# Altium PCB 05-温湿度传感器模块-电路板图.PcbDoc
Units mm, origin at the board's own origin, x right, y up, seen from the top; angles counter-clockwise.
Board outline 35 x 35 mm, 2 copper layers (Top Layer, Bottom Layer); 5 components, 4 nets, 25 pads, 1 vias.
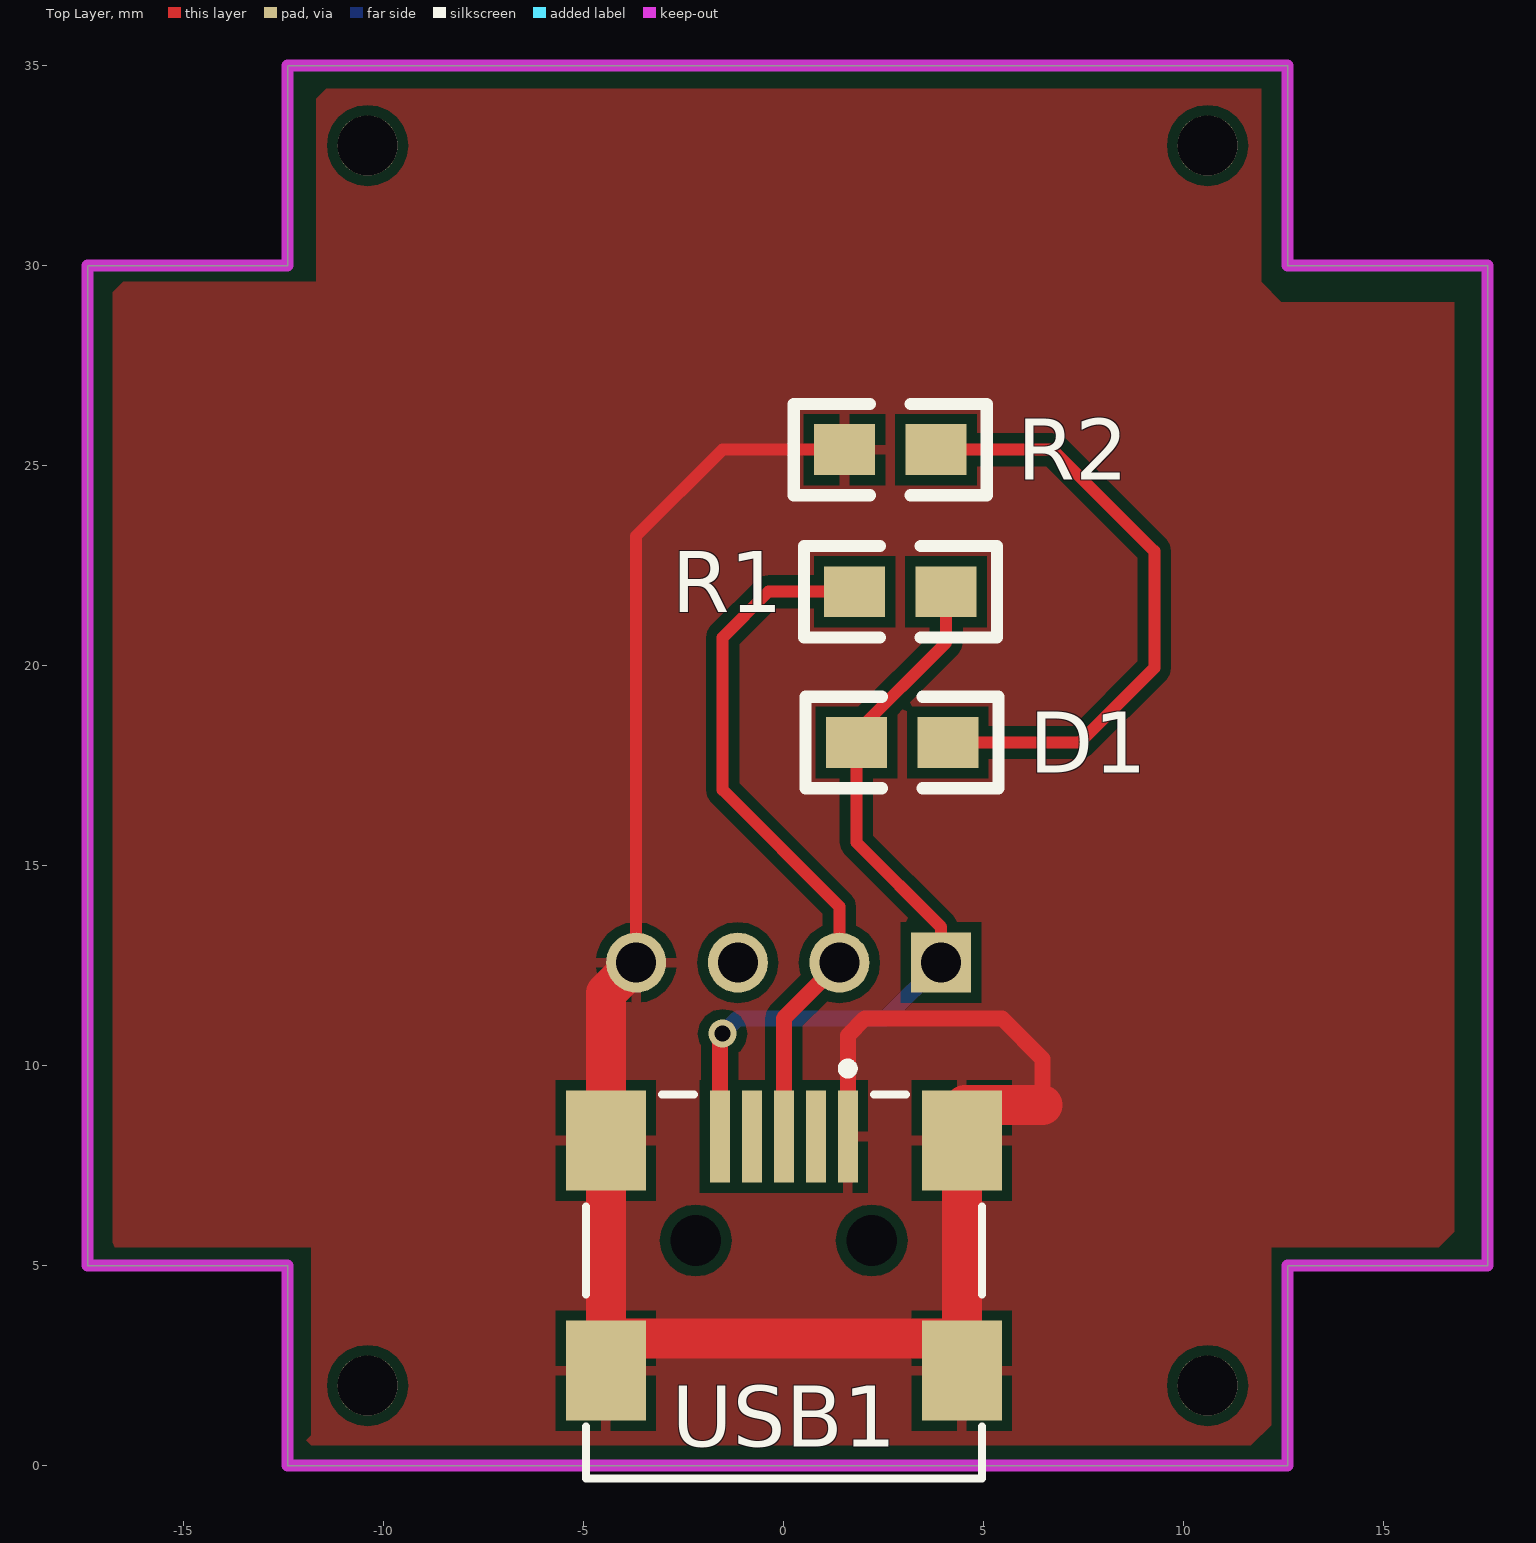
[diagram p0: Top Layer view]
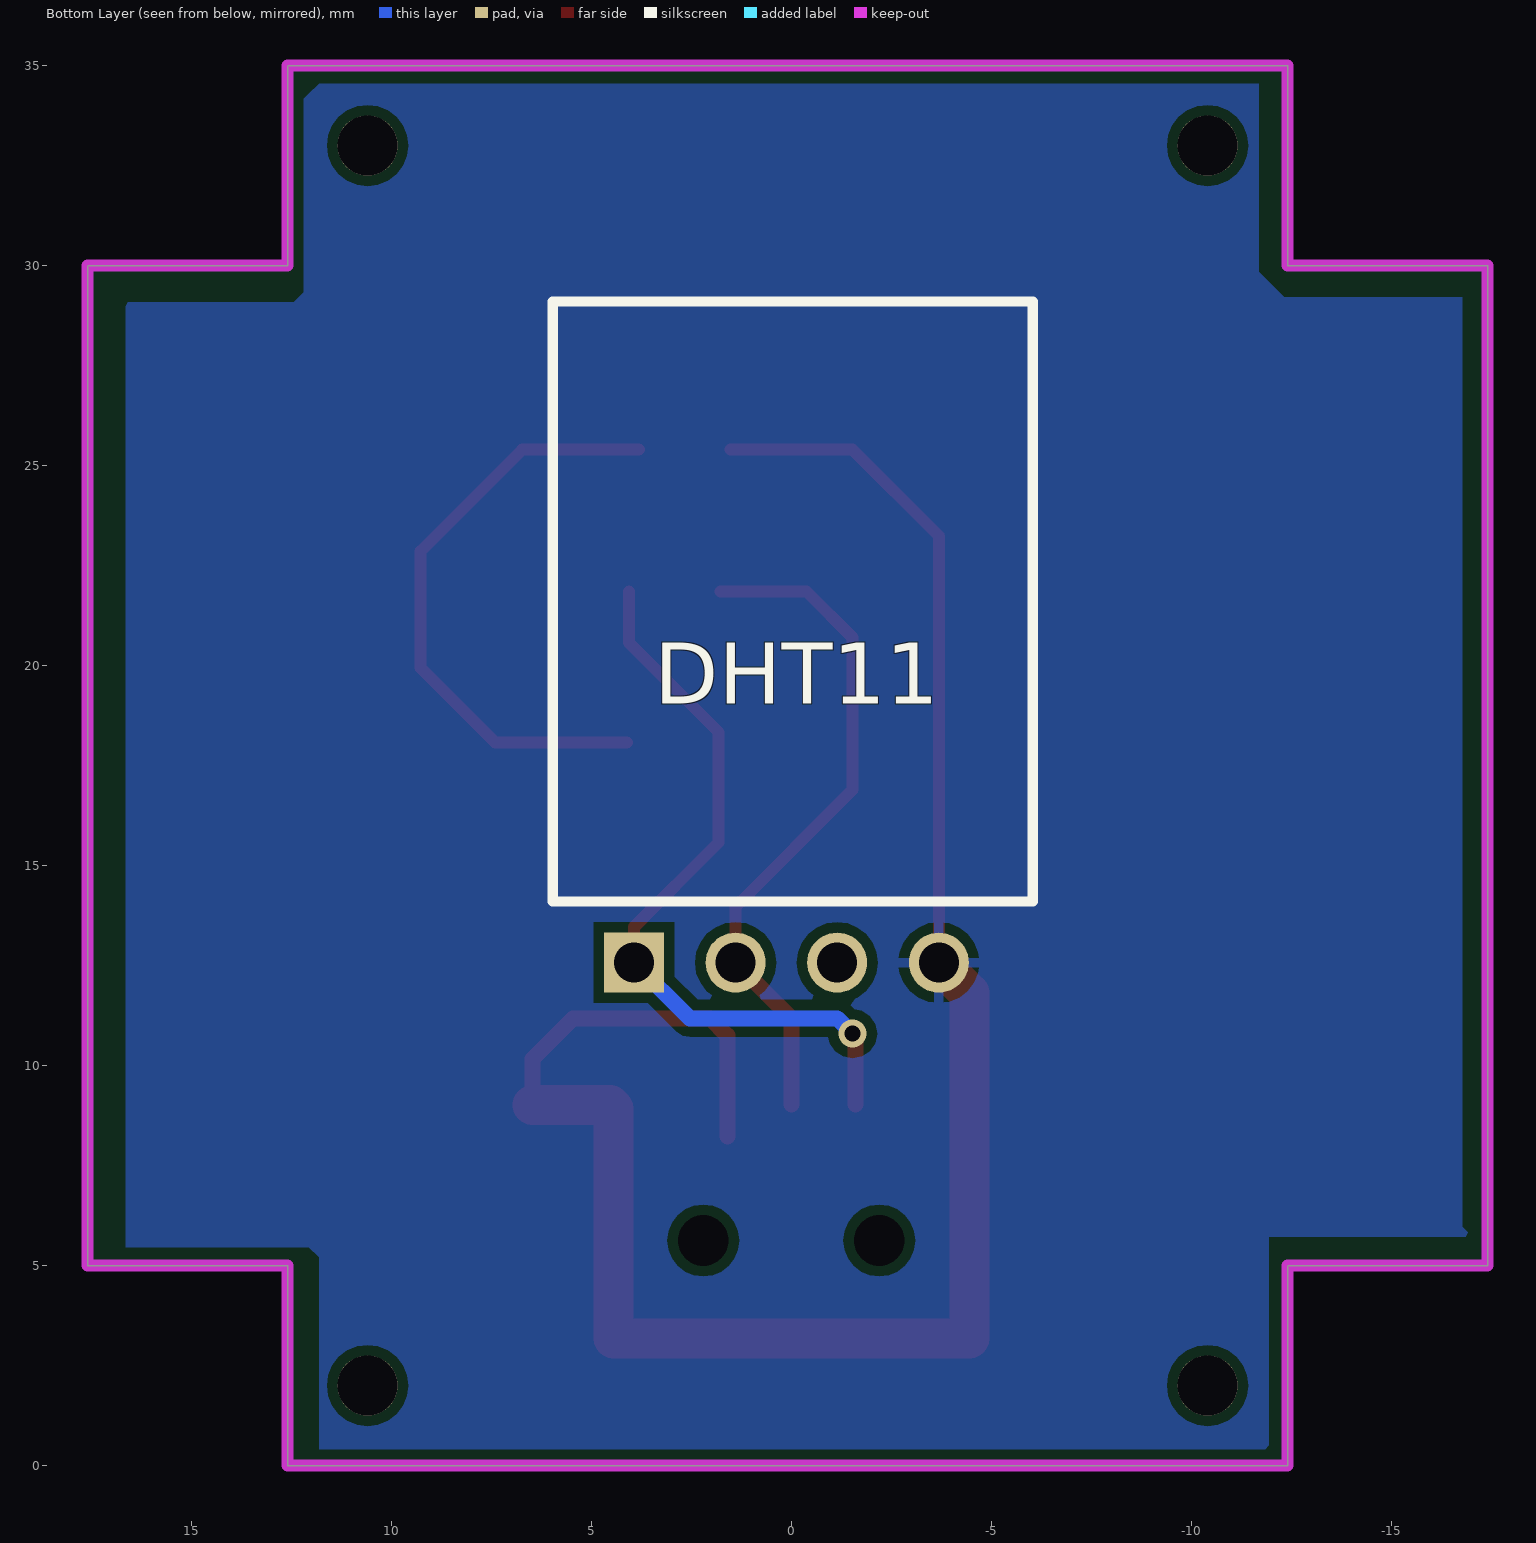
[diagram p1: Bottom Layer view, seen from below]

## Layer stack, top to bottom
Top Layer: signal copper 0.0356
Dielectric: dielectric 0.32, FR-4, Dk 4.8
Bottom Layer: signal copper 0.0356

## Board outline
-17.401,5 -12.401,5 -12.401,0 12.599,0 12.599,5 17.599,5 17.599,30 12.599,30 12.599,35 -12.401,35 -12.401,30 -17.401,30

## Design rules (kind name [scope] priority, off if disabled: settings)
Clearance [All] p1: gap=0.254
PolygonConnect [All] p1: connectstyle=Relief reliefconductorwidth=0.254 reliefentries=4 polygonreliefangle="90 Angle"
RoutingVias [All] p1: holewidth=0.711 width=1.27 viastyle="Through Hole" minholewidth=0.4 minwidth=0.7 maxholewidth=0.711 maxwidth=1.27
SilkscreenOverComponentPads [All] p1: minsilkscreentomaskgap=0.254
SolderMaskExpansion [All] p1: expansion=0.102
TestPointUsage FabricationTestPointUsage [All] p1: valid=0 allowmultiple=FALSE
Testpoint FabricationTestpoint [All] p1: side=3 testpointundercomponent=TRUE minsize=1.016 maxsize=2.54 preferedsize=1.524 minholesize=0 maxholesize=1.016 preferedholesize=0.813 testpointgrid=0.025 style=297 order=0123456789
Width [All] p1: maxlimit=0.3 minlimit=0.3 preferedwidth=0.3
23 further rules are at their usual default settings.

## Components (designator, comment, footprint, x,y, rotation, side; value= is the part's Value field where it differs from the comment)
D1 "LED0" 0805 1.821,18.077 r0 top
DHT11 "Header 4" DHT11 4.318,12.573 r180 bottom
R1 "Res2" 0805 4.064,21.844 r180 top
R2 "Res2" 0805 1.524,25.4 r0 top
USB1 "USB" USB/SM0.8-6H5 0.254,6.18 r90 top (schematic designator USB_1)

## Footprints (in the part's own frame and the unit in brackets; to place one, negate y for a bottom-side part, rotate by r counter-clockwise, add the part's x,y. Pads: shape width x height; smd on the part's side, far side on the other; paste and mask are expansions set on the pad)
0805 [mil]
  rect 60x50 smd: 1(0,-0.06) 2(90,-0.06)
  silkscreen extent -50,-45 140,45
DHT11 [mm]
  rect 1.5x1.5 hole 1: 1(0.381,0)
  round 1.5 hole 1: 2(2.921,0) 3(5.461,0) 4(8.001,0)
  silkscreen extent -1.65,1.52 10.35,16.52
USB/SM0.8-6H5 [mm]
  rect 2.3x0.5 smd: 1(2.044,-1.351) 2(2.044,-0.551) 3(2.044,0.249) 4(2.044,1.049) 5(2.044,1.849)
  rect 2.5x2 smd: 5(-3.81,-4.201) 5(-3.81,4.699) 5(1.944,4.699) 5(1.944,-4.201)
  round 0.6 hole 1.27 unplated: MH1(-0.556,2.449) MH2(-0.556,-1.951)
  silkscreen extent -6.51,-4.7 3.87,5.2

## Part data
D1: "Typical INFRARED GaAs LED"
DHT11: "Header, 4-Pin"
R1 R2: "Resistor"
USB1: library part USB5

## Free pads (board coordinates)
  round 1.5 hole 1.5: 0(-10.401,2) 0(-10.401,33) 0(10.599,2) 0(10.599,33)

## Via types
v1: diameter 0.7, hole 0.4, Top Layer to Bottom Layer, 1 vias

## Nets (pads, with @x,y where several pads share a name; then routed paths per layer and width w, separated by ;. In a path a pad name is that pad's centre, name@x,y a point inside that pad or via, vN(x,y) a via of type N, cw(c..) or ccw(c..) an arc to the next point about the centre after c; other vN are vias at no path point)
GND: DHT11.4 R2.1 USB1.1 USB1.5@4.455,2.37 USB1.5@4.455,8.124 USB1.5@-4.445,2.37 USB1.5@-4.445,8.124 | length 52.5
  Top Layer w0.3: DHT11.4 -3.683,23.241 -1.526,25.398 R2.1
  Top Layer w0.4: USB1.1 1.605,10.749 2.032,11.176 5.461,11.176 6.477,10.16 6.477,9.015 ; USB1.5@4.355,9.029 USB1.5@4.455,8.929
  Top Layer w1: DHT11.4 -4.445,11.811 -4.445,8.929 -4.445,3.175 4.455,3.175 4.455,8.929 4.541,9.015 6.477,9.015
NetD1_2: D1.2 R2.2 | length 15.4
  Top Layer w0.3: R2.2 6.733,25.398 9.271,22.86 9.271,19.939 7.407,18.075 D1.2
NetDHT11_2: DHT11.2 R1.2 USB1.3 | length 17.2
  Top Layer w0.3: DHT11.2 1.397,13.97 -1.524,16.891 -1.524,20.701 -0.379,21.846 R1.2
  Top Layer w0.4: USB1.3@0.005,9.029 0.005,11.181 DHT11.2
VCC: D1.1 DHT11.1 R1.1 USB1.5@-1.595,8.224 | length 19.1
  Top Layer w0.3: DHT11.1 3.937,13.462 1.821,15.578 D1.1 1.821,18.331 4.064,20.574 R1.1
  Top Layer w0.4: USB1.5@-1.595,9.029 -1.595,10.724 v1(-1.524,10.795)
  Top Layer w1: DHT11.1 DHT11.1@3.939,12.571
  Bottom Layer w0.4: v1(-1.524,10.795) -1.143,11.176 2.54,11.176 DHT11.1
pads on no net: DHT11.3 USB1.2 USB1.4 USB1.MH1 USB1.MH2

## Polygon pours and split planes (outlines as drawn)
GND on Top Layer "Top Layer-No Net" (solid): -16.764,29.337 -16.51,29.591 -11.684,29.591 -11.684,34.163 -11.557,34.29 -11.43,34.417 11.938,34.417 11.938,29.591 12.446,29.083 16.764,29.083 16.764,5.842 16.383,5.461 12.192,5.461 12.192,1.016 11.684,0.508 -7.112,0.508 -11.811,0.508 -11.938,0.635 -11.811,0.762 -11.811,5.461 -16.891,5.461 -16.764,5.588 -16.764,29.337
GND on Bottom Layer "Top Layer-No Net" (solid): -16.764,29.21 -12.319,29.21 -11.684,29.845 -11.684,34.544 11.811,34.544 12.065,34.29 12.192,34.163 12.192,29.591 12.192,29.337 12.446,29.083 12.954,29.083 16.764,29.083 16.637,28.956 16.637,5.461 12.065,5.461 11.811,5.207 11.811,0.381 -11.811,0.381 -11.938,0.508 -11.938,5.715 -17.018,5.715 -16.764,5.969 -16.764,29.21

## Keep-outs
Keep-Out Layer:
  lines w0.3: -11.839,0 12.037,0 ; -17.401,5 -17.401,30 -12.401,30 -12.401,35 12.599,35 12.599,30 17.599,30 17.599,5 12.599,5 12.599,0 -12.401,0 -12.401,5 -17.401,5